# EAGLE board Incredible Crift-Amur (EAGLE 9.7.0)

Size 377.97 x 155.34 mm. Coordinates in mm from the lower left corner, seen from the top.
Outline: 0,0 377.97,0 377.97,155.34 0,155.34 0,0
Copper layers (1*16): Top 0.035mm / dielectric 1.5mm / Bottom 0.035mm
Design rules "default": minimum track width 6mil, minimum drill 0.35mm, track to track 6mil, track to pad 6mil, pad to pad 6mil, via to via 6mil, smd to smd 6mil, copper to edge 40mil, drill to drill 6mil, minimum pad ring 10mil, minimum via ring 8mil, stop-mask expansion 4mil, vias tented up to drill 0mil, thermal gap 10mil

## Footprints (pad centres in the part's own frame; a part is rotated, then mirrored left to right if it is on the bottom)
DIODE-AXIAL = drill 1: 1 -5.08,0; 2 5.08,0
LEDRD254W60D565H860B = drill 0.981 pad 1.581: 1 -1.27,0; 2 1.27,0
LU-5-R = drill 0.8: 1 -6.35,-3.81; 5 3.81,-3.81; 6 6.35,-3.81; 7 6.35,3.81; 8 3.81,3.81; 12 -6.35,3.81
1X08 = drill 1.016 long: 1 -8.89,0; 2 -6.35,0; 3 -3.81,0; 4 -1.27,0; 5 1.27,0; 6 3.81,0; 7 6.35,0; 8 8.89,0
1X02 = drill 1.016 long: 1 -1.27,0; 2 1.27,0
BATTERY-GENERIC = drill 1.118 pad 3.15 octagon: + 2.54,0; - -2.54,0
RESAD1016W63L850D250B = drill 0.83 pad 1.43: 1 -5.08,0; 2 5.08,0
SG90 = drill 1.016 long: 1 -2.54,0; 2 0,0; 3 2.54,0
TO92 = drill 0.813 octagon: 1 -1.27,0; 2 0,1.905; 3 1.27,0
ARDUINO-UNO-R3-SHIELD = drill 1.016 pad 1.88: 3.3V 24.13,-2.54; 5V 24.13,0; A0 24.13,12.7; A1 24.13,15.24; A2 24.13,17.78; A3 24.13,20.32; A4 24.13,22.86; A5 24.13,25.4; AREF -24.13,-13.97; D2 -24.13,20.32; D3 -24.13,17.78; D4 -24.13,15.24; D5 -24.13,12.7; D6 -24.13,10.16; D7 -24.13,7.62; D8 -24.13,3.81; D9 -24.13,1.27; D10 -24.13,-1.27; D11 -24.13,-3.81; D12 -24.13,-6.35; D13 -24.13,-8.89; GND@0 24.13,2.54; GND@1 24.13,5.08; GND@2 -24.13,-11.43; IOREF 24.13,-7.62; NC 24.13,-10.16; RES 24.13,-5.08; RX -24.13,25.4; SCL -24.13,-19.05; SDA -24.13,-16.51; TX -24.13,22.86; VIN 24.13,7.62
JHD-162A = drill 1.016 long: 1 -19.05,0; 2 -16.51,0; 3 -13.97,0; 4 -11.43,0; 5 -8.89,0; 6 -6.35,0; 7 -3.81,0; 8 -1.27,0; 9 1.27,0; 10 3.81,0; 11 6.35,0; 12 8.89,0; 13 11.43,0; 14 13.97,0; 15 16.51,0; 16 19.05,0

## Placement (x,y rotation side)
D1  DIODEDIODE-AXIAL  [DIODE-AXIAL]  47.6,110.42 90 top
D2  RED  [LEDRD254W60D565H860B]  73.71,54.76 180 top
K1  RELAY-SPDT_LU-5-R  [LU-5-R]  40.96,129.21 180 top
KEYPAD1  KEYPAD-4X4  [1X08]  300.58,140.23 0 top
L1  LIGHTBULB  [1X02]  43.24,149.07 0 top
P1  BATTERYGENERIC  [BATTERY-GENERIC]  8.26,118.48 180 top
R1  220  [RESAD1016W63L850D250B]  272.25,118.85 90 top
R2  1k  [RESAD1016W63L850D250B]  72.66,84.93 0 top
R3  1k  [RESAD1016W63L850D250B]  72.44,49.68 90 top
R4  100k  [RESAD1016W63L850D250B]  85.82,100.41 90 top
SERVO2  SERVOSG90  [SG90]  370.98,52.68 0 top
T1  NPN  [TO92]  67.64,105.34 0 top
U1  ARDUINO-UNO-R3-SHIELD  [ARDUINO-UNO-R3-SHIELD]  221.35,29.84 270 top
U3  LCD-16X2JHD-162A  [JHD-162A]  203.96,116.01 0 top

## Library data of the parts
D1 K1 KEYPAD1 L1 P1 R1-R4 SERVO2 U1 U3 = Tinkercad
D2 = Tinkercad; CATEGORY: Opto-Electronic; SUB-CATEGORY: LED; VALUE: LED_RED
T1 = Tinkercad; CATEGORY: Transistor; SUB-CATEGORY: BJT; TYPE: NPN

## Nets
D2_C: D2.2 R3.2
D2_C: D2.2 R3.2
P1+: K1.1 L1.1 L1.2 P1.+
P1-: K1.6 P1.-
T1_B: R2.1 T1.2
T1_C: K1.8 T1.1
U1_5V: D1.2 K1.5 R1.1 SERVO2.2 U1.5V U3.2
U1_A0: D2.1 U1.A0
U1_A1: KEYPAD1.5 U1.A1
U1_A2: KEYPAD1.6 U1.A2
U1_A3: KEYPAD1.7 U1.A3
U1_A4: KEYPAD1.8 U1.A4
U1_D2: U1.D2 U3.14
U1_D3: U1.D3 U3.13
U1_D4: U1.D4 U3.12
U1_D5: U1.D5 U3.11
U1_D6: KEYPAD1.1 U1.D6
U1_D7: KEYPAD1.2 U1.D7
U1_D8: KEYPAD1.3 U1.D8
U1_D9: KEYPAD1.4 U1.D9
U1_D10: SERVO2.3 U1.D10
U1_D11: U1.D11 U3.6
U1_D12: U1.D12 U3.4
U1_D13: R2.2 R4.1 U1.D13
U1_GND: R3.1 R4.2 SERVO2.1 T1.3 U1.GND@0 U1.GND@1 U1.GND@2 U3.1 U3.3 U3.5
U3_LED+: R1.2 U3.15

## Tracks (layer width: path | path; a pad name or v marks a point on that pad's centre or on a via)
D2_C  (1 unrouted)
D2_C  (1 unrouted)
P1+  (3 unrouted)
P1-  (1 unrouted)
T1_B  (1 unrouted)
T1_C  (1 unrouted)
U1_5V  (5 unrouted)
U1_A0  (1 unrouted)
U1_A1  (1 unrouted)
U1_A2  (1 unrouted)
U1_A3  (1 unrouted)
U1_A4  (1 unrouted)
U1_D2  (1 unrouted)
U1_D3  (1 unrouted)
U1_D4  (1 unrouted)
U1_D5  (1 unrouted)
U1_D6  (1 unrouted)
U1_D7  (1 unrouted)
U1_D8  (1 unrouted)
U1_D9  (1 unrouted)
U1_D10  (1 unrouted)
U1_D11  (1 unrouted)
U1_D12  (1 unrouted)
U1_D13  (2 unrouted)
U1_GND  (9 unrouted)
U3_LED+  (1 unrouted)